# EAGLE board USBHostShield-Panel-v13 (EAGLE 7.4.0), part 1 of 3
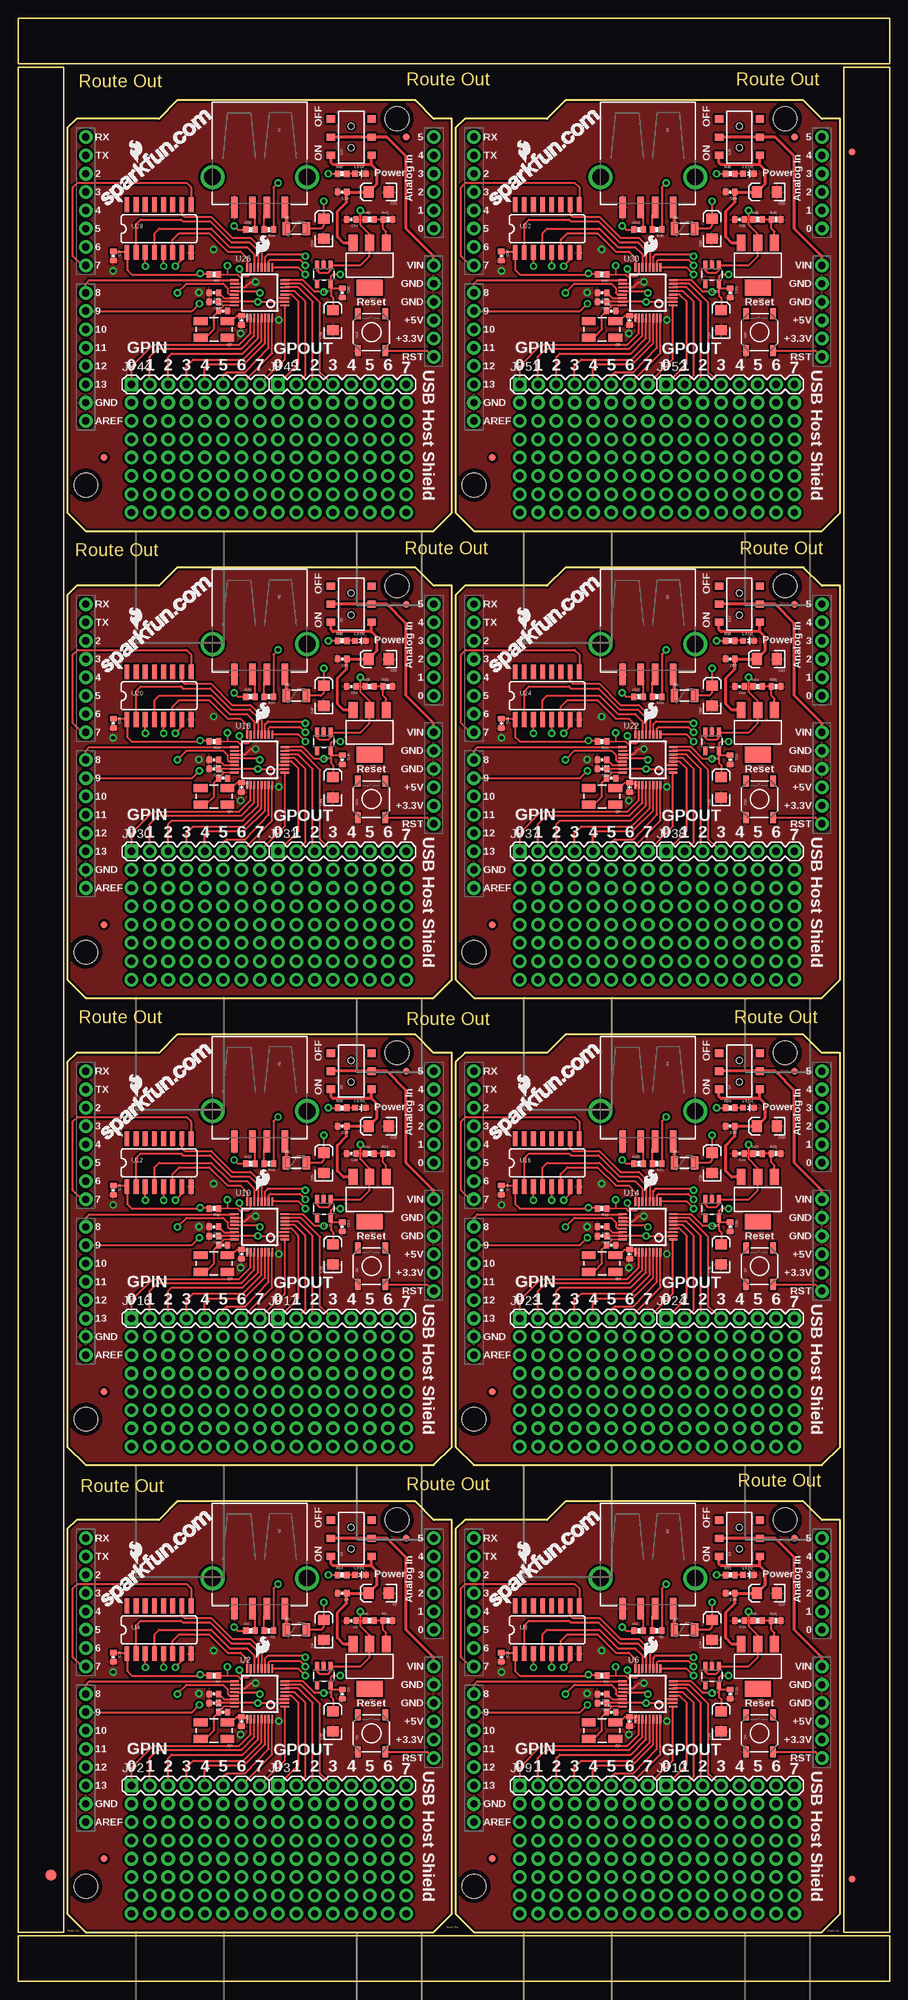
[diagram p0: board, top side]
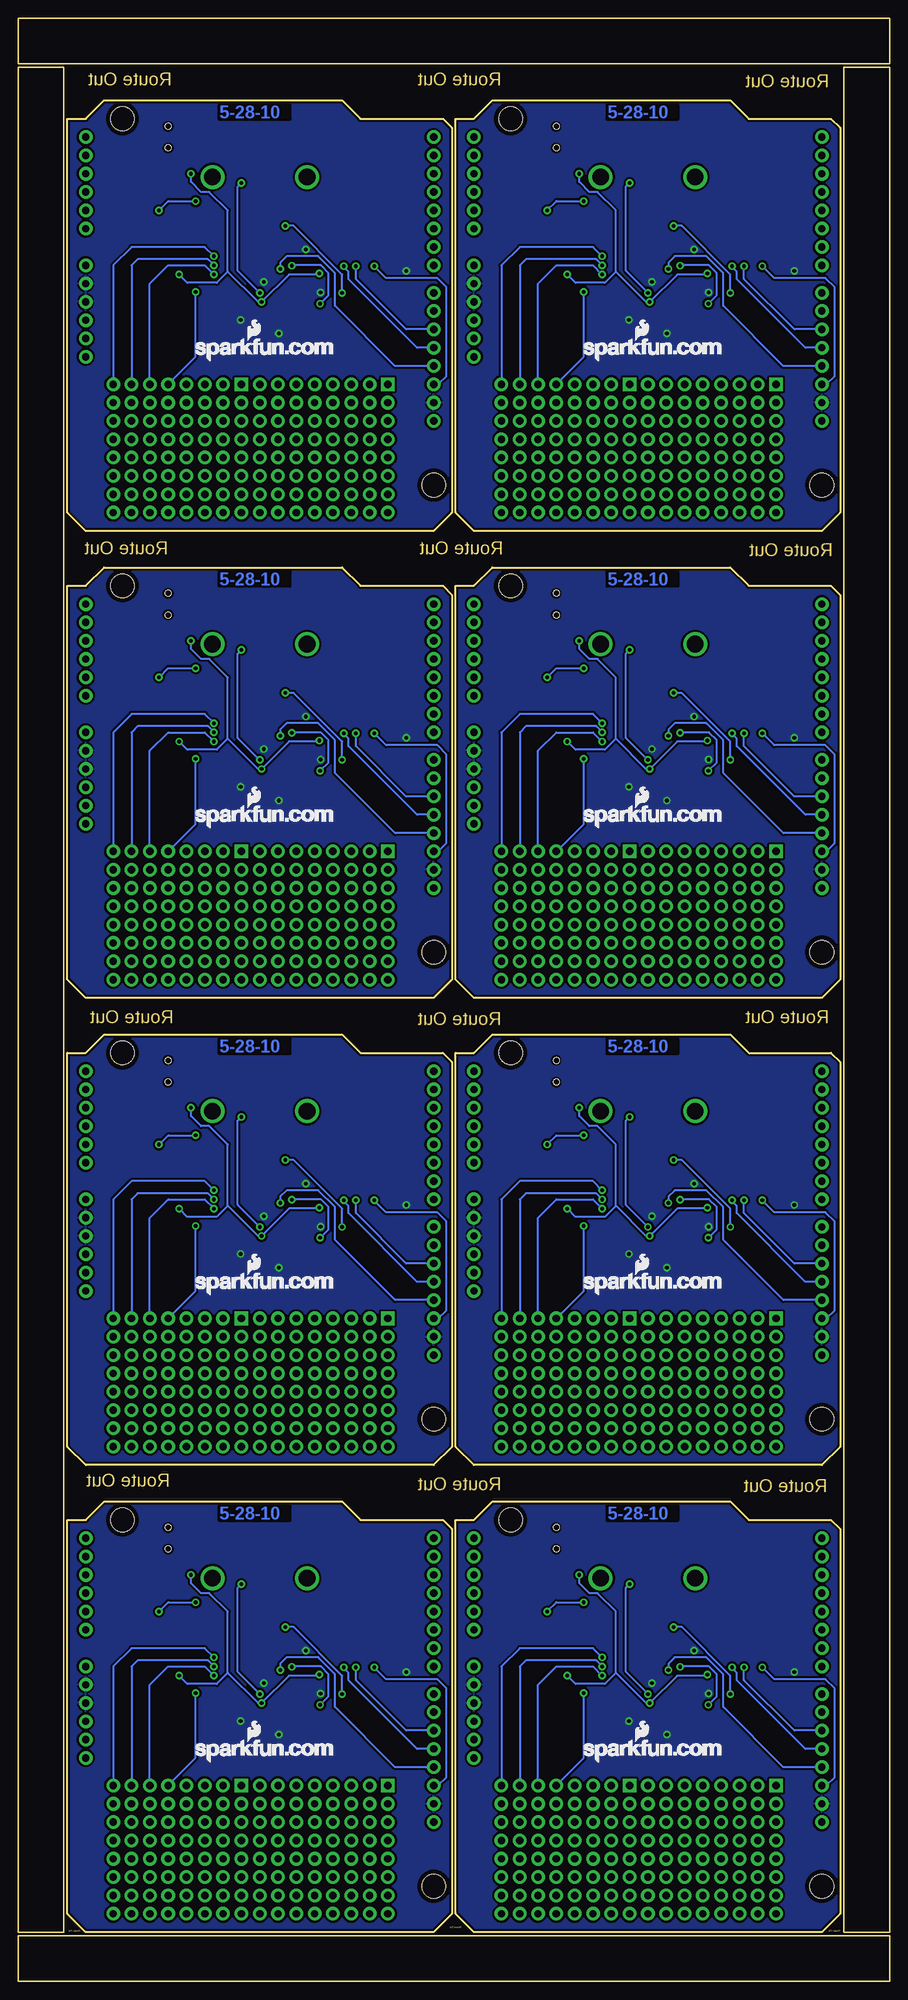
[diagram p1: board, bottom side, seen from below]

Size 120.9 x 272.29 mm. Coordinates in mm from the lower left corner, seen from the top.
Outline: 6.35,79.25 6.35,6.86 0,6.86 0,29.72
Outline: 0,27.18 0,265.43 6.35,265.43 6.35,76.71
Outline: 79.25,0 0,0 0,6.35 29.72,6.35
Outline: 27.18,6.35 120.9,6.35 120.9,0 76.71,0
Outline: 120.9,79.25 120.9,6.86 114.55,6.86 114.55,29.72
Outline: 114.55,27.18 114.55,265.43 120.9,265.43 120.9,76.71
Outline: 79.25,265.94 0,265.94 0,272.29 29.72,272.29
Outline: 27.18,272.29 120.9,272.29 120.9,265.94 76.71,265.94
Outline: 6.86,9.4 9.4,6.86 57.66,6.86 60.2,9.4 60.2,64.01 57.66,64.01 55.12,66.55 22.1,66.55 19.56,64.01 8.13,64.01 6.86,62.74 6.86,9.4
Outline: 60.71,9.4 63.25,6.86 111.51,6.86 114.05,9.4 114.05,64.01 111.51,64.01 108.97,66.55 75.95,66.55 73.41,64.01 61.98,64.01 60.71,62.74 60.71,9.4
Outline: 6.86,74.17 9.4,71.63 57.66,71.63 60.2,74.17 60.2,128.78 57.66,128.78 55.12,131.32 22.1,131.32 19.56,128.78 8.13,128.78 6.86,127.51 6.86,74.17
Outline: 60.71,74.17 63.25,71.63 111.51,71.63 114.05,74.17 114.05,128.78 111.51,128.78 108.97,131.32 75.95,131.32 73.41,128.78 61.98,128.78 60.71,127.51 60.71,74.17
Outline: 6.86,138.94 9.4,136.4 57.66,136.4 60.2,138.94 60.2,193.55 57.66,193.55 55.12,196.09 22.1,196.09 19.56,193.55 8.13,193.55 6.86,192.28 6.86,138.94
Outline: 60.71,138.94 63.25,136.4 111.51,136.4 114.05,138.94 114.05,193.55 111.51,193.55 108.97,196.09 75.95,196.09 73.41,193.55 61.98,193.55 60.71,192.28 60.71,138.94
Outline: 6.86,203.71 9.4,201.17 57.66,201.17 60.2,203.71 60.2,258.32 57.66,258.32 55.12,260.86 22.1,260.86 19.56,258.32 8.13,258.32 6.86,257.05 6.86,203.71
Outline: 60.71,203.71 63.25,201.17 111.51,201.17 114.05,203.71 114.05,258.32 111.51,258.32 108.97,260.86 75.95,260.86 73.41,258.32 61.98,258.32 60.71,257.05 60.71,203.71
Copper layers (1*16): Top 0.035mm / dielectric 1.5mm / Bottom 0.035mm
Design rules "SparkFun": minimum track width 8mil, minimum drill 20mil, track to track 8mil, track to pad 8mil, pad to pad 8mil, via to via 8mil, smd to smd 8mil, copper to edge 8mil, drill to drill 8mil, minimum pad ring 12mil, minimum via ring 10mil, stop-mask expansion 4mil, vias tented up to drill 20mil, thermal gap 10mil

## Footprints (pad centres in the part's own frame; a part is rotated, then mirrored left to right if it is on the bottom)
0402-CAP = smd 0.7 x 0.9: 1 -0.65,0; 2 0.65,0
EIA3216 = smd 1.4 x 1.6: A 1.4,0; C -1.4,0
FIDUCIAL-1.5X3 = smd 1.5 x 1.5: 1 0,0
FIDUCIAL-1X2 = smd 1 x 1: 1 0,0
PTC-1206 = smd 1 x 1.8: 1 -1.4,0; 2 1.4,0
SOT223 = smd 1.219 x 2.235: 1 -2.311,-3.099; 2 0,-3.099; 3 2.311,-3.099 | smd 3.6 x 2.2: 4 0,3.099
1X08 = drill 1.016 pad 1.88 square: 1 0,0 | drill 1.016 pad 1.88: 2 2.54,0; 3 5.08,0; 4 7.62,0; 5 10.16,0; 6 12.7,0; 7 15.24,0; 8 17.78,0
LED-0603 = smd 0.8 x 0.8: A 0,-0.75; C 0,0.75
CRYSTAL-SMD-5X3 = smd 1.9 x 1.1: 1 -1.85,-1.15; 2 1.85,-1.15; 3 1.85,1.15; 4 -1.85,1.15
0402-RES = smd 0.7 x 0.9: 1 -0.65,0; 2 0.65,0
AYZ0202 = smd 1 x 1.15: 1 -2.5,2.825; 2 0,2.825; 3 2.5,2.825; 4 -2.5,-2.825; 5 0,-2.825; 6 2.5,-2.825 | hole 0.85: 1.5,0; -1.5,0
TACTILE_SWITCH_SMD = smd 1.524 x 0.762: 1 -2.54,1.905; 2 2.54,1.905; 3 -2.54,-1.905; 4 2.54,-1.905
DUEMILANOVE_SHIELD = drill 1.016 pad 1.88: 3.3V 50.8,26.67; 5V 50.8,29.21; A0 50.8,41.91; A1 50.8,44.45; A2 50.8,46.99; A3 50.8,49.53; A4 50.8,52.07; A5 50.8,54.61; AREF 2.54,15.24; D2 2.54,49.53; D3 2.54,46.99; D4 2.54,44.45; D5 2.54,41.91; D6 2.54,39.37; D7 2.54,36.83; D8 2.54,33.02; D9 2.54,30.48; D10 2.54,27.94; D11 2.54,25.4; D12 2.54,22.86; D13 2.54,20.32; GND@0 50.8,31.75; GND@1 50.8,34.29; GND@2 2.54,17.78; RES 50.8,24.13; RX 2.54,54.61; TX 2.54,52.07; VIN 50.8,36.83 | hole 3.302: 45.72,57.15; 2.54,6.35
TQFP32-5MM = smd 1.143 x 0.254: 1 -3.5,1.75; 2 -3.5,1.25; 3 -3.5,0.75; 4 -3.5,0.25; 5 -3.5,-0.25; 6 -3.5,-0.75; 7 -3.5,-1.25; 8 -3.5,-1.75; 17 3.5,-1.75; 18 3.5,-1.25; 19 3.5,-0.75; 20 3.5,-0.25; 21 3.5,0.25; 22 3.5,0.75; 23 3.5,1.25; 24 3.5,1.75 | smd 0.254 x 1.143: 9 -1.75,-3.5; 10 -1.25,-3.5; 11 -0.75,-3.5; 12 -0.25,-3.5; 13 0.25,-3.5; 14 0.75,-3.5; 15 1.25,-3.5; 16 1.75,-3.5; 25 1.75,3.5; 26 1.25,3.5; 27 0.75,3.5; 28 0.25,3.5; 29 -0.25,3.5; 30 -0.75,3.5; 31 -1.25,3.5; 32 -1.75,3.5
SOT23-5 = smd 0.55 x 1.2: 1 -0.95,-1.3; 2 0,-1.3; 3 0.95,-1.3; 4 0.95,1.3; 5 -0.95,1.3
SO016 = smd 0.66 x 2.032: 1 -4.445,-3.315; 2 -3.175,-3.315; 3 -1.905,-3.315; 4 -0.635,-3.315; 5 0.635,-3.315; 6 1.905,-3.315; 7 3.175,-3.315; 8 4.445,-3.315; 9 4.445,3.315; 10 3.175,3.315; 11 1.905,3.315; 12 0.635,3.315; 13 -0.635,3.315; 14 -1.905,3.315; 15 -3.175,3.315; 16 -4.445,3.315
USB-A-S-SILK-FEMALE = smd 3 x 0.9: D+ 7.212,-1; D- 7.212,1; GND 7.212,-3.5; VBUS 7.212,3.5 | drill 2.311: P$5 3,-6.566; P$6 3,6.566

## Placement (x,y rotation side)
C1  0.1uF  [0402-CAP]  27.18,39.88 180 top
C2  0.1uF  [0402-CAP]  27.18,38.61 180 top
C3  0.1uF  [0402-CAP]  44.96,39.88 270 top
C4  10uF  [EIA3216]  42.42,48.77 90 top
C5  18pF  [0402-CAP]  30.99,36.07 270 top
C6  18pF  [0402-CAP]  28.45,37.34 0 top
C7  10uF  [EIA3216]  50.04,53.85 180 top
C8  0.1uF  [0402-CAP]  44.96,53.85 180 top
C9  0.1uF  [0402-CAP]  46.23,50.04 180 top
C10  10uF  [EIA3216]  43.69,36.07 90 top
C11  0.1uF  [0402-CAP]  13.21,44.96 270 top
C12  0.1uF  [0402-CAP]  81.03,38.61 180 top
C13  0.1uF  [0402-CAP]  98.81,39.88 270 top
C14  10uF  [EIA3216]  96.27,48.77 90 top
C15  18pF  [0402-CAP]  84.84,36.07 270 top
C16  18pF  [0402-CAP]  82.3,37.34 0 top
C17  10uF  [EIA3216]  103.89,53.85 180 top
C18  0.1uF  [0402-CAP]  98.81,53.85 180 top
C19  0.1uF  [0402-CAP]  100.08,50.04 180 top
C20  0.1uF  [0402-CAP]  81.03,39.88 180 top
C21  10uF  [EIA3216]  97.54,36.07 90 top
C22  0.1uF  [0402-CAP]  67.06,44.96 270 top
C23  0.1uF  [0402-CAP]  27.18,103.38 180 top
C24  0.1uF  [0402-CAP]  44.96,104.65 270 top
C25  10uF  [EIA3216]  42.42,113.54 90 top
C26  18pF  [0402-CAP]  30.99,100.84 270 top
C27  18pF  [0402-CAP]  28.45,102.11 0 top
C28  10uF  [EIA3216]  50.04,118.62 180 top
C29  0.1uF  [0402-CAP]  44.96,118.62 180 top
C30  0.1uF  [0402-CAP]  46.23,114.81 180 top
C31  0.1uF  [0402-CAP]  27.18,104.65 180 top
C32  10uF  [EIA3216]  43.69,100.84 90 top
C33  0.1uF  [0402-CAP]  13.21,109.73 270 top
C34  0.1uF  [0402-CAP]  81.03,103.38 180 top
C35  0.1uF  [0402-CAP]  98.81,104.65 270 top
C36  10uF  [EIA3216]  96.27,113.54 90 top
C37  18pF  [0402-CAP]  84.84,100.84 270 top
C38  18pF  [0402-CAP]  82.3,102.11 0 top
C39  10uF  [EIA3216]  103.89,118.62 180 top
C40  0.1uF  [0402-CAP]  98.81,118.62 180 top
C41  0.1uF  [0402-CAP]  100.08,114.81 180 top
C42  0.1uF  [0402-CAP]  81.03,104.65 180 top
C43  10uF  [EIA3216]  97.54,100.84 90 top
C44  0.1uF  [0402-CAP]  67.06,109.73 270 top
C45  0.1uF  [0402-CAP]  27.18,168.15 180 top
C46  0.1uF  [0402-CAP]  44.96,169.42 270 top
C47  10uF  [EIA3216]  42.42,178.31 90 top
C48  18pF  [0402-CAP]  30.99,165.61 270 top
C49  18pF  [0402-CAP]  28.45,166.88 0 top
C50  10uF  [EIA3216]  50.04,183.39 180 top
C51  0.1uF  [0402-CAP]  44.96,183.39 180 top
C52  0.1uF  [0402-CAP]  46.23,179.58 180 top
C53  0.1uF  [0402-CAP]  27.18,169.42 180 top
C54  10uF  [EIA3216]  43.69,165.61 90 top
C55  0.1uF  [0402-CAP]  13.21,174.5 270 top
C56  0.1uF  [0402-CAP]  81.03,168.15 180 top
C57  0.1uF  [0402-CAP]  98.81,169.42 270 top
C58  10uF  [EIA3216]  96.27,178.31 90 top
C59  18pF  [0402-CAP]  84.84,165.61 270 top
C60  18pF  [0402-CAP]  82.3,166.88 0 top
C61  10uF  [EIA3216]  103.89,183.39 180 top
C62  0.1uF  [0402-CAP]  98.81,183.39 180 top
C63  0.1uF  [0402-CAP]  100.08,179.58 180 top
C64  0.1uF  [0402-CAP]  81.03,169.42 180 top
C65  10uF  [EIA3216]  97.54,165.61 90 top
C66  0.1uF  [0402-CAP]  67.06,174.5 270 top
C67  0.1uF  [0402-CAP]  27.18,232.92 180 top
C68  0.1uF  [0402-CAP]  44.96,234.19 270 top
C69  10uF  [EIA3216]  42.42,243.08 90 top
C70  18pF  [0402-CAP]  30.99,230.38 270 top
C71  18pF  [0402-CAP]  28.45,231.65 0 top
C72  10uF  [EIA3216]  50.04,248.16 180 top
C73  0.1uF  [0402-CAP]  44.96,248.16 180 top
C74  0.1uF  [0402-CAP]  46.23,244.35 180 top
C75  0.1uF  [0402-CAP]  27.18,234.19 180 top
C76  10uF  [EIA3216]  43.69,230.38 90 top
C77  0.1uF  [0402-CAP]  13.21,239.27 270 top
C78  0.1uF  [0402-CAP]  81.03,232.92 180 top
C79  0.1uF  [0402-CAP]  98.81,234.19 270 top
C80  10uF  [EIA3216]  96.27,243.08 90 top
C81  18pF  [0402-CAP]  84.84,230.38 270 top
C82  18pF  [0402-CAP]  82.3,231.65 0 top
C83  10uF  [EIA3216]  103.89,248.16 180 top
C84  0.1uF  [0402-CAP]  98.81,248.16 180 top
C85  0.1uF  [0402-CAP]  100.08,244.35 180 top
C86  0.1uF  [0402-CAP]  81.03,234.19 180 top
C87  10uF  [EIA3216]  97.54,230.38 90 top
C88  0.1uF  [0402-CAP]  67.06,239.27 270 top
E$1  [FIDUCIAL-1.5X3]  4.57,14.73 0 top
E$2  [FIDUCIAL-1X2]  115.7,253.75 0 top
E$5  [FIDUCIAL-1X2]  115.7,14.22 0 top
F1  PTCSMD  [PTC-1206]  38.61,48.77 0 top
F2  PTCSMD  [PTC-1206]  92.46,48.77 0 top
F3  PTCSMD  [PTC-1206]  38.61,113.54 0 top
F4  PTCSMD  [PTC-1206]  92.46,113.54 0 top
F5  PTCSMD  [PTC-1206]  38.61,178.31 0 top
F6  PTCSMD  [PTC-1206]  92.46,178.31 0 top
F7  PTCSMD  [PTC-1206]  38.61,243.08 0 top
F8  PTCSMD  [PTC-1206]  92.46,243.08 0 top
IC1  lm1117  [SOT223]  48.77,43.69 180 top
IC2  lm1117  [SOT223]  102.62,43.69 180 top
IC3  lm1117  [SOT223]  48.77,108.46 180 top
IC4  lm1117  [SOT223]  102.62,108.46 180 top
IC5  lm1117  [SOT223]  48.77,173.23 180 top
IC6  lm1117  [SOT223]  102.62,173.23 180 top
IC7  lm1117  [SOT223]  48.77,238 180 top
IC8  lm1117  [SOT223]  102.62,238 180 top
JP1  LOGO-SFENEW  [SFE-NEW-WEBLOGO]  12.96,51.16 40 top
JP2  GPIN  [1X08]  15.75,27.18 0 top
JP3  GPOUT  [1X08]  36.07,27.18 0 top
JP4  LOGO-SFESK  [SFE-LOGO-FLAME]  33.02,44.96 0 top
JP5  LOGO-SFENEW  [SFE-NEW-WEBLOGO]  42.45,30.4 0 bottom
JP6  FIDUCIAL1X2  [FIDUCIAL-1X2]  11.94,17.02 0 top
JP7  FIDUCIAL1X2  [FIDUCIAL-1X2]  53.85,61.47 0 top
JP8  LOGO-SFENEW  [SFE-NEW-WEBLOGO]  66.81,51.16 40 top
JP9  GPIN  [1X08]  69.6,27.18 0 top
JP10  GPOUT  [1X08]  89.92,27.18 0 top
JP11  LOGO-SFENEW  [SFE-NEW-WEBLOGO]  96.3,30.4 0 bottom
JP12  LOGO-SFESK  [SFE-LOGO-FLAME]  86.87,44.96 0 top
JP13  FIDUCIAL1X2  [FIDUCIAL-1X2]  65.79,17.02 0 top
JP14  FIDUCIAL1X2  [FIDUCIAL-1X2]  107.7,61.47 0 top
JP15  LOGO-SFENEW  [SFE-NEW-WEBLOGO]  12.96,115.93 40 top
JP16  GPIN  [1X08]  15.75,91.95 0 top
JP17  GPOUT  [1X08]  36.07,91.95 0 top
JP18  LOGO-SFENEW  [SFE-NEW-WEBLOGO]  42.45,95.17 0 bottom
JP19  LOGO-SFESK  [SFE-LOGO-FLAME]  33.02,109.73 0 top
JP20  FIDUCIAL1X2  [FIDUCIAL-1X2]  11.94,81.79 0 top
JP21  FIDUCIAL1X2  [FIDUCIAL-1X2]  53.85,126.24 0 top
JP22  LOGO-SFENEW  [SFE-NEW-WEBLOGO]  66.81,115.93 40 top
JP23  GPIN  [1X08]  69.6,91.95 0 top
JP24  GPOUT  [1X08]  89.92,91.95 0 top
JP25  LOGO-SFENEW  [SFE-NEW-WEBLOGO]  96.3,95.17 0 bottom
JP26  LOGO-SFESK  [SFE-LOGO-FLAME]  86.87,109.73 0 top
JP27  FIDUCIAL1X2  [FIDUCIAL-1X2]  65.79,81.79 0 top
JP28  FIDUCIAL1X2  [FIDUCIAL-1X2]  107.7,126.24 0 top
JP29  LOGO-SFENEW  [SFE-NEW-WEBLOGO]  12.96,180.7 40 top
JP30  GPIN  [1X08]  15.75,156.72 0 top
JP31  GPOUT  [1X08]  36.07,156.72 0 top
JP32  LOGO-SFENEW  [SFE-NEW-WEBLOGO]  42.45,159.94 0 bottom
JP33  LOGO-SFESK  [SFE-LOGO-FLAME]  33.02,174.5 0 top
JP34  FIDUCIAL1X2  [FIDUCIAL-1X2]  11.94,146.56 0 top
JP35  FIDUCIAL1X2  [FIDUCIAL-1X2]  53.85,191.01 0 top
JP36  LOGO-SFENEW  [SFE-NEW-WEBLOGO]  66.81,180.7 40 top
JP37  GPIN  [1X08]  69.6,156.72 0 top
JP38  GPOUT  [1X08]  89.92,156.72 0 top
JP39  LOGO-SFENEW  [SFE-NEW-WEBLOGO]  96.3,159.94 0 bottom
JP40  LOGO-SFESK  [SFE-LOGO-FLAME]  86.87,174.5 0 top
JP41  FIDUCIAL1X2  [FIDUCIAL-1X2]  65.79,146.56 0 top
JP42  FIDUCIAL1X2  [FIDUCIAL-1X2]  107.7,191.01 0 top
JP43  LOGO-SFENEW  [SFE-NEW-WEBLOGO]  12.96,245.47 40 top
JP44  GPIN  [1X08]  15.75,221.49 0 top
JP45  GPOUT  [1X08]  36.07,221.49 0 top
JP46  LOGO-SFENEW  [SFE-NEW-WEBLOGO]  42.45,224.71 0 bottom
JP47  LOGO-SFESK  [SFE-LOGO-FLAME]  33.02,239.27 0 top
JP48  FIDUCIAL1X2  [FIDUCIAL-1X2]  11.94,211.33 0 top
JP49  FIDUCIAL1X2  [FIDUCIAL-1X2]  53.85,255.78 0 top
JP50  LOGO-SFENEW  [SFE-NEW-WEBLOGO]  66.81,245.47 40 top
JP51  GPIN  [1X08]  69.6,221.49 0 top
JP52  GPOUT  [1X08]  89.92,221.49 0 top
JP53  LOGO-SFENEW  [SFE-NEW-WEBLOGO]  96.3,224.71 0 bottom
JP54  LOGO-SFESK  [SFE-LOGO-FLAME]  86.87,239.27 0 top
JP55  FIDUCIAL1X2  [FIDUCIAL-1X2]  65.79,211.33 0 top
JP56  FIDUCIAL1X2  [FIDUCIAL-1X2]  107.7,255.78 0 top
LED1  red  [LED-0603]  47.5,56.39 270 top
LED2  red  [LED-0603]  101.35,56.39 270 top
LED3  red  [LED-0603]  47.5,121.16 270 top
LED4  red  [LED-0603]  101.35,121.16 270 top
LED5  red  [LED-0603]  47.5,185.93 270 top
LED6  red  [LED-0603]  101.35,185.93 270 top
LED7  red  [LED-0603]  47.5,250.7 270 top
LED8  red  [LED-0603]  101.35,250.7 270 top
Q1  12MHz  [CRYSTAL-SMD-5X3]  81.03,34.8 180 top
Q2  12MHz  [CRYSTAL-SMD-5X3]  27.18,34.8 180 top
Q3  12MHz  [CRYSTAL-SMD-5X3]  27.18,99.57 180 top
Q4  12MHz  [CRYSTAL-SMD-5X3]  81.03,99.57 180 top
Q5  12MHz  [CRYSTAL-SMD-5X3]  27.18,164.34 180 top
Q6  12MHz  [CRYSTAL-SMD-5X3]  81.03,164.34 180 top
Q7  12MHz  [CRYSTAL-SMD-5X3]  27.18,229.11 180 top
Q8  12MHz  [CRYSTAL-SMD-5X3]  81.03,229.11 180 top
R1  33  [0402-RES]  32.26,48.64 0 top
R2  33  [0402-RES]  34.8,48.64 180 top
R3  2.2K  [0402-RES]  81.03,42.42 180 top
R4  33  [0402-RES]  86.11,48.64 0 top
R5  33  [0402-RES]  88.65,48.64 180 top
R6  240  [0402-RES]  102.62,50.04 0 top
R7  2.2K  [0402-RES]  27.18,42.42 180 top
R8  240  [0402-RES]  48.77,50.04 0 top
R9  715  [0402-RES]  51.31,50.04 0 top
R10  715  [0402-RES]  105.16,50.04 0 top
R11  330  [0402-RES]  98.81,56.39 0 top
R12  2.2K  [0402-RES]  27.18,107.19 180 top
R13  33  [0402-RES]  32.26,113.41 0 top
R14  330  [0402-RES]  44.96,56.39 0 top
R15  33  [0402-RES]  34.8,113.41 180 top
R16  240  [0402-RES]  48.77,114.81 0 top
R17  715  [0402-RES]  51.31,114.81 0 top
R18  330  [0402-RES]  44.96,121.16 0 top
R19  2.2K  [0402-RES]  81.03,107.19 180 top
R20  33  [0402-RES]  86.11,113.41 0 top
R21  33  [0402-RES]  88.65,113.41 180 top
R22  240  [0402-RES]  102.62,114.81 0 top
R23  715  [0402-RES]  105.16,114.81 0 top
R24  330  [0402-RES]  98.81,121.16 0 top
R25  2.2K  [0402-RES]  27.18,171.96 180 top
R26  33  [0402-RES]  32.26,178.18 0 top
R27  33  [0402-RES]  34.8,178.18 180 top
R28  240  [0402-RES]  48.77,179.58 0 top
R29  715  [0402-RES]  51.31,179.58 0 top
R30  330  [0402-RES]  44.96,185.93 0 top
R31  2.2K  [0402-RES]  81.03,171.96 180 top
R32  33  [0402-RES]  86.11,178.18 0 top
R33  33  [0402-RES]  88.65,178.18 180 top
R34  240  [0402-RES]  102.62,179.58 0 top
R35  715  [0402-RES]  105.16,179.58 0 top
R36  330  [0402-RES]  98.81,185.93 0 top
R37  2.2K  [0402-RES]  27.18,236.73 180 top
R38  33  [0402-RES]  32.26,242.95 0 top
R39  33  [0402-RES]  34.8,242.95 180 top
R40  240  [0402-RES]  48.77,244.35 0 top
R41  715  [0402-RES]  51.31,244.35 0 top
R42  330  [0402-RES]  44.96,250.7 0 top
R43  2.2K  [0402-RES]  81.03,236.73 180 top
R44  33  [0402-RES]  86.11,242.95 0 top
R45  33  [0402-RES]  88.65,242.95 180 top
R46  240  [0402-RES]  102.62,244.35 0 top
R47  715  [0402-RES]  105.16,244.35 0 top
R48  330  [0402-RES]  98.81,250.7 0 top
S1  SWITCH-DPDTSMD  [AYZ0202]  46.23,61.47 90 top
S2  SWITCH-SMD  [TACTILE_SWITCH_SMD]  49.02,34.42 90 top
S3  SWITCH-DPDTSMD  [AYZ0202]  100.08,61.47 90 top
S4  SWITCH-SMD  [TACTILE_SWITCH_SMD]  102.87,34.42 90 top
S5  SWITCH-DPDTSMD  [AYZ0202]  46.23,126.24 90 top
S6  SWITCH-SMD  [TACTILE_SWITCH_SMD]  49.02,99.19 90 top
S7  SWITCH-DPDTSMD  [AYZ0202]  100.08,126.24 90 top
S8  SWITCH-SMD  [TACTILE_SWITCH_SMD]  102.87,99.19 90 top
S9  SWITCH-DPDTSMD  [AYZ0202]  46.23,191.01 90 top
S10  SWITCH-SMD  [TACTILE_SWITCH_SMD]  49.02,163.96 90 top
S11  SWITCH-DPDTSMD  [AYZ0202]  100.08,191.01 90 top
S12  SWITCH-SMD  [TACTILE_SWITCH_SMD]  102.87,163.96 90 top
S13  SWITCH-DPDTSMD  [AYZ0202]  46.23,255.78 90 top
S14  SWITCH-SMD  [TACTILE_SWITCH_SMD]  49.02,228.73 90 top
S15  SWITCH-DPDTSMD  [AYZ0202]  100.08,255.78 90 top
S16  SWITCH-SMD  [TACTILE_SWITCH_SMD]  102.87,228.73 90 top
U1  ARDUINO_SHIELD  [DUEMILANOVE_SHIELD]  6.86,6.86 0 top
U2  MAX3421E  [TQFP32-5MM]  33.53,39.88 180 top
U3  3.3V_REG  [SOT23-5]  42.42,42.42 180 top
U4  HEX_CONVERTER  [SO016]  19.56,48.77 0 top
U5  ARDUINO_SHIELD  [DUEMILANOVE_SHIELD]  60.71,6.86 0 top
U6  MAX3421E  [TQFP32-5MM]  87.38,39.88 180 top
U7  3.3V_REG  [SOT23-5]  96.27,42.42 180 top
U8  HEX_CONVERTER  [SO016]  73.41,48.77 0 top
U9  ARDUINO_SHIELD  [DUEMILANOVE_SHIELD]  6.86,71.63 0 top
U10  MAX3421E  [TQFP32-5MM]  33.53,104.65 180 top
U11  3.3V_REG  [SOT23-5]  42.42,107.19 180 top
U12  HEX_CONVERTER  [SO016]  19.56,113.54 0 top
U13  ARDUINO_SHIELD  [DUEMILANOVE_SHIELD]  60.71,71.63 0 top
U14  MAX3421E  [TQFP32-5MM]  87.38,104.65 180 top
U15  3.3V_REG  [SOT23-5]  96.27,107.19 180 top
U16  HEX_CONVERTER  [SO016]  73.41,113.54 0 top
U17  ARDUINO_SHIELD  [DUEMILANOVE_SHIELD]  6.86,136.4 0 top
U18  MAX3421E  [TQFP32-5MM]  33.53,169.42 180 top
U19  3.3V_REG  [SOT23-5]  42.42,171.96 180 top
U20  HEX_CONVERTER  [SO016]  19.56,178.31 0 top
U21  ARDUINO_SHIELD  [DUEMILANOVE_SHIELD]  60.71,136.4 0 top
U22  MAX3421E  [TQFP32-5MM]  87.38,169.42 180 top
U23  3.3V_REG  [SOT23-5]  96.27,171.96 180 top
U24  HEX_CONVERTER  [SO016]  73.41,178.31 0 top
U25  ARDUINO_SHIELD  [DUEMILANOVE_SHIELD]  6.86,201.17 0 top
U26  MAX3421E  [TQFP32-5MM]  33.53,234.19 180 top
U27  3.3V_REG  [SOT23-5]  42.42,236.73 180 top
U28  HEX_CONVERTER  [SO016]  19.56,243.08 0 top
U29  ARDUINO_SHIELD  [DUEMILANOVE_SHIELD]  60.71,201.17 0 top
U30  MAX3421E  [TQFP32-5MM]  87.38,234.19 180 top
U31  3.3V_REG  [SOT23-5]  96.27,236.73 180 top
U32  HEX_CONVERTER  [SO016]  73.41,243.08 0 top
X1  USB_  [USB-A-S-SILK-FEMALE]  87.38,58.93 270 top
X2  USB_  [USB-A-S-SILK-FEMALE]  33.53,58.93 270 top
X3  USB_  [USB-A-S-SILK-FEMALE]  33.53,123.7 270 top
X4  USB_  [USB-A-S-SILK-FEMALE]  87.38,123.7 270 top
X5  USB_  [USB-A-S-SILK-FEMALE]  33.53,188.47 270 top
X6  USB_  [USB-A-S-SILK-FEMALE]  87.38,188.47 270 top
X7  USB_  [USB-A-S-SILK-FEMALE]  33.53,253.24 270 top
X8  USB_  [USB-A-S-SILK-FEMALE]  87.38,253.24 270 top

## Library data of the parts
C1-C88 F1-F8 IC1-IC8 JP1-JP56 LED1-LED8 Q1-Q8 R1-R48 S1-S16 U1-U32 X1-X8 = SparkFun
E$1 = SparkFun-Retired
E$2 E$5 = SparkFun-Aesthetics

## Nets
3.3V: C2.1 C3.1 C10.A C11.1 R7.2 R14.1 U2.2 U2.23 U3.5 U4.1
3.3V1: C12.1 C13.1 C21.A C22.1 R3.2 R11.1 U6.2 U6.23 U7.5 U8.1
3.3V2: C23.1 C24.1 C32.A C33.1 R12.2 R18.1 U10.2 U10.23 U11.5 U12.1
3.3V3: C34.1 C35.1 C43.A C44.1 R19.2 R24.1 U14.2 U14.23 U15.5 U16.1
3.3V4: C45.1 C46.1 C54.A C55.1 R25.2 R30.1 U18.2 U18.23 U19.5 U20.1
3.3V5: C56.1 C57.1 C65.A C66.1 R31.2 R36.1 U22.2 U22.23 U23.5 U24.1
3.3V6: C67.1 C68.1 C76.A C77.1 R37.2 R42.1 U26.2 U26.23 U27.5 U28.1
3.3V7: C78.1 C79.1 C87.A C88.1 R43.2 R48.1 U30.2 U30.23 U31.5 U32.1
5V: C4.A C9.1 F1.2 IC1.2 R8.1 U3.1 U3.3
5V1: C14.A C19.1 F2.2 IC2.2 R6.1 U7.1 U7.3
5V2: C25.A C30.1 F3.2 IC3.2 R16.1 U11.1 U11.3
5V3: C36.A C41.1 F4.2 IC4.2 R22.1 U15.1 U15.3
5V4: C47.A C52.1 F5.2 IC5.2 R28.1 U19.1 U19.3
5V5: C58.A C63.1 F6.2 IC6.2 R34.1 U23.1 U23.3
5V6: C69.A C74.1 F7.2 IC7.2 R40.1 U27.1 U27.3
5V7: C80.A C85.1 F8.2 IC8.2 R46.1 U31.1 U31.3
GND: C1.2 C2.2 C3.2 C4.C C5.2 C6.2 C7.C C8.2 C9.2 C10.C C11.2 LED1.C R9.2 S2.1 U1.GND@0 U1.GND@1 U1.GND@2 U2.3 U2.19 U3.2 U4.8 X2.GND
GND1: C12.2 C13.2 C14.C C15.2 C16.2 C17.C C18.2 C19.2 C20.2 C21.C C22.2 LED2.C R10.2 S4.1 U5.GND@0 U5.GND@1 U5.GND@2 U6.3 U6.19 U7.2 U8.8 X1.GND
GND2: C23.2 C24.2 C25.C C26.2 C27.2 C28.C C29.2 C30.2 C31.2 C32.C C33.2 LED3.C R17.2 S6.1 U9.GND@0 U9.GND@1 U9.GND@2 U10.3 U10.19 U11.2 U12.8 X3.GND
GND3: C34.2 C35.2 C36.C C37.2 C38.2 C39.C C40.2 C41.2 C42.2 C43.C C44.2 LED4.C R23.2 S8.1 U13.GND@0 U13.GND@1 U13.GND@2 U14.3 U14.19 U15.2 U16.8 X4.GND
GND4: C45.2 C46.2 C47.C C48.2 C49.2 C50.C C51.2 C52.2 C53.2 C54.C C55.2 LED5.C R29.2 S10.1 U17.GND@0 U17.GND@1 U17.GND@2 U18.3 U18.19 U19.2 U20.8 X5.GND
GND5: C56.2 C57.2 C58.C C59.2 C60.2 C61.C C62.2 C63.2 C64.2 C65.C C66.2 LED6.C R35.2 S12.1 U21.GND@0 U21.GND@1 U21.GND@2 U22.3 U22.19 U23.2 U24.8 X6.GND
GND6: C67.2 C68.2 C69.C C70.2 C71.2 C72.C C73.2 C74.2 C75.2 C76.C C77.2 LED7.C R41.2 S14.1 U25.GND@0 U25.GND@1 U25.GND@2 U26.3 U26.19 U27.2 U28.8 X7.GND
GND7: C78.2 C79.2 C80.C C81.2 C82.2 C83.C C84.2 C85.2 C86.2 C87.C C88.2 LED8.C R47.2 S16.1 U29.GND@0 U29.GND@1 U29.GND@2 U30.3 U30.19 U31.2 U32.8 X8.GND
GPX: U1.D8 U2.17
GPX1: U5.D8 U6.17
GPX2: U9.D8 U10.17
GPX3: U13.D8 U14.17
GPX4: U17.D8 U18.17
GPX5: U21.D8 U22.17
GPX6: U25.D8 U26.17
GPX7: U29.D8 U30.17
INT: R7.1 U1.D9 U2.18
INT1: R3.1 U5.D9 U6.18
INT2: R12.1 U9.D9 U10.18
INT3: R19.1 U13.D9 U14.18
INT4: R25.1 U17.D9 U18.18
INT5: R31.1 U21.D9 U22.18
INT6: R37.1 U25.D9 U26.18
INT7: R43.1 U29.D9 U30.18
MISO: U1.D12 U2.15
MISO1: U5.D12 U6.15
MISO2: U9.D12 U10.15
MISO3: U13.D12 U14.15
MISO4: U17.D12 U18.15
MISO5: U21.D12 U22.15
MISO6: U25.D12 U26.15
MISO7: U29.D12 U30.15
MOSI: U1.D11 U4.7
MOSI1: U5.D11 U8.7
MOSI2: U9.D11 U12.7
MOSI3: U13.D11 U16.7
MOSI4: U17.D11 U20.7
MOSI5: U21.D11 U24.7
MOSI6: U25.D11 U28.7
MOSI7: U29.D11 U32.7
MOSI-IN: U2.16 U4.6
MOSI-IN1: U6.16 U8.6
MOSI-IN2: U10.16 U12.6
MOSI-IN3: U14.16 U16.6
MOSI-IN4: U18.16 U20.6
MOSI-IN5: U22.16 U24.6
MOSI-IN6: U26.16 U28.6
MOSI-IN7: U30.16 U32.6
N$1: JP2.8 U2.1
N$2: R2.1 U2.20
N$3: R1.1 U2.21
N$4: JP3.1 U2.4
N$5: R1.2 X2.D+
N$6: JP3.2 U2.5
N$7: JP3.3 U2.6
N$8: R2.2 X2.D-
N$9: C5.1 Q2.1 U2.25
N$10: C6.1 Q2.3 U2.24
N$11: IC1.1 R8.2 R9.1
N$12: S2.3 U1.RES
N$13: JP3.4 U2.7
N$14: JP3.5 U2.8
N$15: JP3.6 U2.9
N$16: JP3.7 U2.10
N$17: JP3.8 U2.11
N$18: JP2.7 U2.32
N$19: JP2.6 U2.31
N$20: JP2.5 U2.30
N$21: JP2.4 U2.29
N$22: JP2.3 U2.28
N$23: JP2.2 U2.27
N$24: JP2.1 U2.26
N$25: LED1.A R14.2
N$138: F1.1 X2.VBUS
N$139: R4.2 X1.D+
N$140: R5.2 X1.D-
N$141: R5.1 U6.20
N$142: R4.1 U6.21
N$143: C15.1 Q1.1 U6.25
N$144: C16.1 Q1.3 U6.24
N$145: IC2.1 R6.2 R10.1
N$146: JP9.8 U6.1
N$147: JP10.1 U6.4
N$148: JP10.2 U6.5
N$149: JP10.3 U6.6
N$150: JP10.4 U6.7
N$151: JP10.5 U6.8
N$152: JP10.6 U6.9
N$153: JP10.7 U6.10
N$154: JP10.8 U6.11
N$155: JP9.7 U6.32
N$156: JP9.6 U6.31
N$157: JP9.5 U6.30
N$158: JP9.4 U6.29
N$159: JP9.3 U6.28
N$160: JP9.2 U6.27
N$161: JP9.1 U6.26
N$162: S4.3 U5.RES
N$163: LED2.A R11.2
N$276: F2.1 X1.VBUS
N$277: R13.2 X3.D+
N$278: R15.2 X3.D-
N$279: R15.1 U10.20
N$280: R13.1 U10.21
N$281: C26.1 Q3.1 U10.25
N$282: C27.1 Q3.3 U10.24
N$283: IC3.1 R16.2 R17.1
N$284: JP16.8 U10.1
N$285: JP17.1 U10.4
N$286: JP17.2 U10.5
N$287: JP17.3 U10.6
N$288: JP17.4 U10.7
N$289: JP17.5 U10.8
N$290: JP17.6 U10.9
N$291: JP17.7 U10.10
N$292: JP17.8 U10.11
N$293: JP16.7 U10.32
N$294: JP16.6 U10.31
N$295: JP16.5 U10.30
N$296: JP16.4 U10.29
N$297: JP16.3 U10.28
N$298: JP16.2 U10.27
N$299: JP16.1 U10.26
N$300: S6.3 U9.RES
N$301: LED3.A R18.2
N$414: F3.1 X3.VBUS
N$415: R20.2 X4.D+
N$416: R21.2 X4.D-
N$417: R21.1 U14.20
N$418: R20.1 U14.21
N$419: C37.1 Q4.1 U14.25
N$420: C38.1 Q4.3 U14.24
N$421: IC4.1 R22.2 R23.1
N$422: JP23.8 U14.1
N$423: JP24.1 U14.4
N$424: JP24.2 U14.5
N$425: JP24.3 U14.6
N$426: JP24.4 U14.7
N$427: JP24.5 U14.8
N$428: JP24.6 U14.9
N$429: JP24.7 U14.10
N$430: JP24.8 U14.11
N$431: JP23.7 U14.32
N$432: JP23.6 U14.31
N$433: JP23.5 U14.30
N$434: JP23.4 U14.29
N$435: JP23.3 U14.28
N$436: JP23.2 U14.27
N$437: JP23.1 U14.26
N$438: S8.3 U13.RES
N$439: LED4.A R24.2
N$552: F4.1 X4.VBUS
N$553: R26.2 X5.D+
N$554: R27.2 X5.D-
N$555: R27.1 U18.20
N$556: R26.1 U18.21
N$557: C48.1 Q5.1 U18.25
N$558: C49.1 Q5.3 U18.24
N$559: IC5.1 R28.2 R29.1
N$560: JP30.8 U18.1
N$561: JP31.1 U18.4
N$562: JP31.2 U18.5
N$563: JP31.3 U18.6
N$564: JP31.4 U18.7
N$565: JP31.5 U18.8
N$566: JP31.6 U18.9
N$567: JP31.7 U18.10
N$568: JP31.8 U18.11
N$569: JP30.7 U18.32
N$570: JP30.6 U18.31
N$571: JP30.5 U18.30
N$572: JP30.4 U18.29
N$573: JP30.3 U18.28
N$574: JP30.2 U18.27
N$575: JP30.1 U18.26
N$576: S10.3 U17.RES
N$577: LED5.A R30.2
N$690: F5.1 X5.VBUS
N$691: R32.2 X6.D+
N$692: R33.2 X6.D-
N$693: R33.1 U22.20
N$694: R32.1 U22.21
N$695: C59.1 Q6.1 U22.25
N$696: C60.1 Q6.3 U22.24
N$697: IC6.1 R34.2 R35.1
N$698: JP37.8 U22.1
N$699: JP38.1 U22.4
N$700: JP38.2 U22.5
N$701: JP38.3 U22.6
N$702: JP38.4 U22.7
N$703: JP38.5 U22.8
N$704: JP38.6 U22.9
N$705: JP38.7 U22.10
N$706: JP38.8 U22.11
N$707: JP37.7 U22.32
N$708: JP37.6 U22.31
N$709: JP37.5 U22.30
N$710: JP37.4 U22.29
N$711: JP37.3 U22.28
N$712: JP37.2 U22.27
N$713: JP37.1 U22.26
N$714: S12.3 U21.RES
N$715: LED6.A R36.2
N$828: F6.1 X6.VBUS
N$829: R38.2 X7.D+
N$830: R39.2 X7.D-
N$831: R39.1 U26.20
N$832: R38.1 U26.21
N$833: C70.1 Q7.1 U26.25
N$834: C71.1 Q7.3 U26.24
N$835: IC7.1 R40.2 R41.1
N$836: JP44.8 U26.1
N$837: JP45.1 U26.4
N$838: JP45.2 U26.5
N$839: JP45.3 U26.6
N$840: JP45.4 U26.7
N$841: JP45.5 U26.8
N$842: JP45.6 U26.9
N$843: JP45.7 U26.10
N$844: JP45.8 U26.11
N$845: JP44.7 U26.32
N$846: JP44.6 U26.31
N$847: JP44.5 U26.30
N$848: JP44.4 U26.29
N$849: JP44.3 U26.28
N$850: JP44.2 U26.27
N$851: JP44.1 U26.26
N$852: S14.3 U25.RES
N$853: LED7.A R42.2
N$966: F7.1 X7.VBUS
N$967: R44.2 X8.D+
N$968: R45.2 X8.D-
N$969: R45.1 U30.20
N$970: R44.1 U30.21
N$971: C81.1 Q8.1 U30.25
N$972: C82.1 Q8.3 U30.24
N$973: IC8.1 R46.2 R47.1
N$974: JP51.8 U30.1
N$975: JP52.1 U30.4
N$976: JP52.2 U30.5
N$977: JP52.3 U30.6
N$978: JP52.4 U30.7
N$979: JP52.5 U30.8
N$980: JP52.6 U30.9
N$981: JP52.7 U30.10
N$982: JP52.8 U30.11
N$983: JP51.7 U30.32
N$984: JP51.6 U30.31
N$985: JP51.5 U30.30
N$986: JP51.4 U30.29
N$987: JP51.3 U30.28
N$988: JP51.2 U30.27
N$989: JP51.1 U30.26
N$990: S16.3 U29.RES
N$991: LED8.A R48.2
N$1104: F8.1 X8.VBUS
RESET: U1.D7 U4.9
RESET1: U5.D7 U8.9
RESET2: U9.D7 U12.9
RESET3: U13.D7 U16.9
RESET4: U17.D7 U20.9
RESET5: U21.D7 U24.9
RESET6: U25.D7 U28.9
RESET7: U29.D7 U32.9
RESET-IN: U2.12 U4.10
RESET-IN1: U6.12 U8.10
RESET-IN2: U10.12 U12.10
RESET-IN3: U14.12 U16.10
RESET-IN4: U18.12 U20.10
RESET-IN5: U22.12 U24.10
RESET-IN6: U26.12 U28.10
RESET-IN7: U30.12 U32.10
SCK: U1.D13 U4.3
SCK1: U5.D13 U8.3
SCK2: U9.D13 U12.3
SCK3: U13.D13 U16.3
SCK4: U17.D13 U20.3
SCK5: U21.D13 U24.3
SCK6: U25.D13 U28.3
SCK7: U29.D13 U32.3
SCK-IN: U2.13 U4.2
SCK-IN1: U6.13 U8.2
SCK-IN2: U10.13 U12.2
SCK-IN3: U14.13 U16.2
SCK-IN4: U18.13 U20.2
SCK-IN5: U22.13 U24.2
SCK-IN6: U26.13 U28.2
SCK-IN7: U30.13 U32.2
SS: U1.D10 U4.5
SS1: U5.D10 U8.5
SS2: U9.D10 U12.5
SS3: U13.D10 U16.5
SS4: U17.D10 U20.5
SS5: U21.D10 U24.5
SS6: U25.D10 U28.5
SS7: U29.D10 U32.5
SS-IN: U2.14 U4.4
SS-IN1: U6.14 U8.4
SS-IN2: U10.14 U12.4
SS-IN3: U14.14 U16.4
SS-IN4: U18.14 U20.4
SS-IN5: U22.14 U24.4
SS-IN6: U26.14 U28.4
SS-IN7: U30.14 U32.4
VBCOMP: C1.1 U2.22
VBCOMP1: C20.1 U6.22
VBCOMP2: C31.1 U10.22
VBCOMP3: C42.1 U14.22
VBCOMP4: C53.1 U18.22
VBCOMP5: C64.1 U22.22
VBCOMP6: C75.1 U26.22
VBCOMP7: C86.1 U30.22
VBUS: C7.A C8.1 IC1.3 S1.1 S1.4
VBUS1: C17.A C18.1 IC2.3 S3.1 S3.4
VBUS2: C28.A C29.1 IC3.3 S5.1 S5.4
VBUS3: C39.A C40.1 IC4.3 S7.1 S7.4
VBUS4: C50.A C51.1 IC5.3 S9.1 S9.4
VBUS5: C61.A C62.1 IC6.3 S11.1 S11.4
VBUS6: C72.A C73.1 IC7.3 S13.1 S13.4
VBUS7: C83.A C84.1 IC8.3 S15.1 S15.4
VIN: S1.2 S1.5 U1.VIN
VIN1: S3.2 S3.5 U5.VIN
VIN2: S5.2 S5.5 U9.VIN
VIN3: S7.2 S7.5 U13.VIN
VIN4: S9.2 S9.5 U17.VIN
VIN5: S11.2 S11.5 U21.VIN
VIN6: S13.2 S13.5 U25.VIN
VIN7: S15.2 S15.5 U29.VIN

## Tracks (layer width: path | path; a pad name or v marks a point on that pad's centre or on a via)
3.3V  (via drill 0.51)
  Top 0.254: v43.05,56.39 R14.1 | v44.7,42.42 43.69,42.42 43.37,42.1 U3.5 43.4,41.15 43.4,40.51 | U2.2 33.29,38.63 v33.27,38.61 33.25,38.63 U2.23 27.85,38.63 C2.1 | R7.2 26.4,42.55 v25.27,42.55 25.15,42.42 15.75,42.42 15.11,43.05 U4.1 14.96,45.61 C11.1 | 43.4,40.51 43.4,39.46 43.69,39.17 C10.A | C3.1 43.41,40.53 43.4,40.51
  Bottom 0.254: v25.27,42.55 25.4,42.42 29.46,42.42 v33.27,38.61 33.29,38.63 33.78,38.63 37.97,42.82 | v43.05,56.39 43.05,55.24 41.66,53.85 40.51,53.85 37.97,51.31 37.97,42.82 | 37.97,42.82 37.97,42.8 39.5,41.27 43.56,41.27 v44.7,42.42
3.3V1  (via drill 0.51)
  Top 0.254: v96.9,56.39 R11.1 | v98.55,42.42 97.54,42.42 97.22,42.1 U7.5 97.25,41.15 97.25,40.51 | U6.2 87.14,38.63 v87.12,38.61 87.1,38.63 U6.23 81.7,38.63 C12.1 | R3.2 80.25,42.55 v79.12,42.55 78.99,42.42 69.6,42.42 68.96,43.05 U8.1 68.81,45.61 C22.1 | 97.25,40.51 97.25,39.46 97.54,39.17 C21.A | C13.1 97.26,40.53 97.25,40.51
  Bottom 0.254: v79.12,42.55 79.25,42.42 83.31,42.42 v87.12,38.61 87.14,38.63 87.63,38.63 91.82,42.82 | v96.9,56.39 96.9,55.24 95.5,53.85 94.36,53.85 91.82,51.31 91.82,42.82 | 91.82,42.82 91.82,42.8 93.34,41.27 97.41,41.27 v98.55,42.42
3.3V2  (via drill 0.51)
  Top 0.254: v43.05,121.16 R18.1 | v44.7,107.19 43.69,107.19 43.37,106.87 U11.5 43.4,105.92 43.4,105.28 | U10.2 33.29,103.4 v33.27,103.38 33.25,103.4 U10.23 27.85,103.4 C23.1 | R12.2 26.4,107.31 v25.27,107.31 25.15,107.19 15.75,107.19 15.11,107.82 U12.1 14.96,110.38 C33.1 | 43.4,105.28 43.4,104.23 43.69,103.94 C32.A | C24.1 43.41,105.3 43.4,105.28
  Bottom 0.254: v25.27,107.31 25.4,107.19 29.46,107.19 v33.27,103.38 33.29,103.4 33.78,103.4 37.97,107.59 | v43.05,121.16 43.05,120.02 41.66,118.62 40.51,118.62 37.97,116.08 37.97,107.59 | 37.97,107.59 37.97,107.57 39.5,106.05 43.56,106.05 v44.7,107.19
3.3V3  (via drill 0.51)
  Top 0.254: v96.9,121.16 R24.1 | v98.55,107.19 97.54,107.19 97.22,106.87 U15.5 97.25,105.92 97.25,105.28 | U14.2 87.14,103.4 v87.12,103.38 87.1,103.4 U14.23 81.7,103.4 C34.1 | R19.2 80.25,107.31 v79.12,107.31 78.99,107.19 69.6,107.19 68.96,107.82 U16.1 68.81,110.38 C44.1 | 97.25,105.28 97.25,104.23 97.54,103.94 C43.A | C35.1 97.26,105.3 97.25,105.28
  Bottom 0.254: v79.12,107.31 79.25,107.19 83.31,107.19 v87.12,103.38 87.14,103.4 87.63,103.4 91.82,107.59 | v96.9,121.16 96.9,120.02 95.5,118.62 94.36,118.62 91.82,116.08 91.82,107.59 | 91.82,107.59 91.82,107.57 93.34,106.05 97.41,106.05 v98.55,107.19
3.3V4  (via drill 0.51)
  Top 0.254: v43.05,185.93 R30.1 | v44.7,171.96 43.69,171.96 43.37,171.64 U19.5 43.4,170.69 43.4,170.05 | U18.2 33.29,168.17 v33.27,168.15 33.25,168.17 U18.23 27.85,168.17 C45.1 | R25.2 26.4,172.09 v25.27,172.09 25.15,171.96 15.75,171.96 15.11,172.59 U20.1 14.96,175.15 C55.1 | 43.4,170.05 43.4,169 43.69,168.71 C54.A | C46.1 43.41,170.07 43.4,170.05
  Bottom 0.254: v25.27,172.09 25.4,171.96 29.46,171.96 v33.27,168.15 33.29,168.17 33.78,168.17 37.97,172.36 | v43.05,185.93 43.05,184.78 41.66,183.39 40.51,183.39 37.97,180.85 37.97,172.36 | 37.97,172.36 37.97,172.34 39.5,170.81 43.56,170.81 v44.7,171.96
3.3V5  (via drill 0.51)
  Top 0.254: v96.9,185.93 R36.1 | v98.55,171.96 97.54,171.96 97.22,171.64 U23.5 97.25,170.69 97.25,170.05 | U22.2 87.14,168.17 v87.12,168.15 87.1,168.17 U22.23 81.7,168.17 C56.1 | R31.2 80.25,172.09 v79.12,172.09 78.99,171.96 69.6,171.96 68.96,172.59 U24.1 68.81,175.15 C66.1 | 97.25,170.05 97.25,169 97.54,168.71 C65.A | C57.1 97.26,170.07 97.25,170.05
  Bottom 0.254: v79.12,172.09 79.25,171.96 83.31,171.96 v87.12,168.15 87.14,168.17 87.63,168.17 91.82,172.36 | v96.9,185.93 96.9,184.78 95.5,183.39 94.36,183.39 91.82,180.85 91.82,172.36 | 91.82,172.36 91.82,172.34 93.34,170.81 97.41,170.81 v98.55,171.96
3.3V6  (via drill 0.51)
  Top 0.254: v43.05,250.7 R42.1 | v44.7,236.73 43.69,236.73 43.37,236.41 U27.5 43.4,235.46 43.4,234.82 | U26.2 33.29,232.94 v33.27,232.92 33.25,232.94 U26.23 27.85,232.94 C67.1 | R37.2 26.4,236.85 v25.27,236.85 25.15,236.73 15.75,236.73 15.11,237.36 U28.1 14.96,239.92 C77.1 | 43.4,234.82 43.4,233.77 43.69,233.48 C76.A | C68.1 43.41,234.84 43.4,234.82
  Bottom 0.254: v25.27,236.85 25.4,236.73 29.46,236.73 v33.27,232.92 33.29,232.94 33.78,232.94 37.97,237.13 | v43.05,250.7 43.05,249.56 41.66,248.16 40.51,248.16 37.97,245.62 37.97,237.13 | 37.97,237.13 37.97,237.11 39.5,235.59 43.56,235.59 v44.7,236.73
3.3V7  (via drill 0.51)
  Top 0.254: v96.9,250.7 R48.1 | v98.55,236.73 97.54,236.73 97.22,236.41 U31.5 97.25,235.46 97.25,234.82 | U30.2 87.14,232.94 v87.12,232.92 87.1,232.94 U30.23 81.7,232.94 C78.1 | R43.2 80.25,236.85 v79.12,236.85 78.99,236.73 69.6,236.73 68.96,237.36 U32.1 68.81,239.92 C88.1 | 97.25,234.82 97.25,233.77 97.54,233.48 C87.A | C79.1 97.26,234.84 97.25,234.82
  Bottom 0.254: v79.12,236.85 79.25,236.73 83.31,236.73 v87.12,232.92 87.14,232.94 87.63,232.94 91.82,237.13 | v96.9,250.7 96.9,249.56 95.5,248.16 94.36,248.16 91.82,245.62 91.82,237.13 | 91.82,237.13 91.82,237.11 93.34,235.59 97.41,235.59 v98.55,236.73
5V  (via drill 0.51)
  Top 0.254: U3.1 43.4,43.69 | C4.A
  Top 0.305: 43.4,43.69 47.5,43.69 48.77,44.96 IC1.2 48.77,48.01 47.5,49.28 47.5,50.04 | U3.1 43.37,42.99 43.05,42.67 41.78,42.67 41.47,42.99 U3.3 | v42.42,52.58 C4.A 42.42,49.15 42.04,48.77 F1.2 | 47.5,50.04 v47.5,51.31 | 47.5,50.04 R8.1 | 47.5,50.04 C9.1
  Bottom 0.305: v47.5,51.31 46.23,52.58 v42.42,52.58
5V1  (via drill 0.51)
  Top 0.254: U7.1 97.25,43.69 | C14.A
  Top 0.305: 97.25,43.69 101.35,43.69 102.62,44.96 IC2.2 102.62,48.01 101.35,49.28 101.35,50.04 | U7.1 97.22,42.99 96.9,42.67 95.63,42.67 95.32,42.99 U7.3 | v96.27,52.58 C14.A 96.27,49.15 95.89,48.77 F2.2 | 101.35,50.04 v101.35,51.31 | 101.35,50.04 R6.1 | 101.35,50.04 C19.1
  Bottom 0.305: v101.35,51.31 100.08,52.58 v96.27,52.58
5V2  (via drill 0.51)
  Top 0.254: U11.1 43.4,108.46 | C25.A
  Top 0.305: 43.4,108.46 47.5,108.46 48.77,109.73 IC3.2 48.77,112.78 47.5,114.05 47.5,114.81 | U11.1 43.37,107.76 43.05,107.44 41.78,107.44 41.47,107.76 U11.3 | v42.42,117.35 C25.A 42.42,113.92 42.04,113.54 F3.2 | 47.5,114.81 v47.5,116.08 | 47.5,114.81 R16.1 | 47.5,114.81 C30.1
  Bottom 0.305: v47.5,116.08 46.23,117.35 v42.42,117.35
5V3  (via drill 0.51)
  Top 0.254: U15.1 97.25,108.46 | C36.A
  Top 0.305: 97.25,108.46 101.35,108.46 102.62,109.73 IC4.2 102.62,112.78 101.35,114.05 101.35,114.81 | U15.1 97.22,107.76 96.9,107.44 95.63,107.44 95.32,107.76 U15.3 | v96.27,117.35 C36.A 96.27,113.92 95.89,113.54 F4.2 | 101.35,114.81 v101.35,116.08 | 101.35,114.81 R22.1 | 101.35,114.81 C41.1
  Bottom 0.305: v101.35,116.08 100.08,117.35 v96.27,117.35
5V4  (via drill 0.51)
  Top 0.254: U19.1 43.4,173.23 | C47.A
  Top 0.305: 43.4,173.23 47.5,173.23 48.77,174.5 IC5.2 48.77,177.55 47.5,178.82 47.5,179.58 | U19.1 43.37,172.53 43.05,172.21 41.78,172.21 41.47,172.53 U19.3 | v42.42,182.12 C47.A 42.42,178.69 42.04,178.31 F5.2 | 47.5,179.58 v47.5,180.85 | 47.5,179.58 R28.1 | 47.5,179.58 C52.1
  Bottom 0.305: v47.5,180.85 46.23,182.12 v42.42,182.12
5V5  (via drill 0.51)
  Top 0.254: U23.1 97.25,173.23 | C58.A
  Top 0.305: 97.25,173.23 101.35,173.23 102.62,174.5 IC6.2 102.62,177.55 101.35,178.82 101.35,179.58 | U23.1 97.22,172.53 96.9,172.21 95.63,172.21 95.32,172.53 U23.3 | v96.27,182.12 C58.A 96.27,178.69 95.89,178.31 F6.2 | 101.35,179.58 v101.35,180.85 | 101.35,179.58 R34.1 | 101.35,179.58 C63.1
  Bottom 0.305: v101.35,180.85 100.08,182.12 v96.27,182.12
5V6  (via drill 0.51)
  Top 0.254: U27.1 43.4,238 | C69.A
  Top 0.305: 43.4,238 47.5,238 48.77,239.27 IC7.2 48.77,242.32 47.5,243.59 47.5,244.35 | U27.1 43.37,237.3 43.05,236.98 41.78,236.98 41.47,237.3 U27.3 | v42.42,246.89 C69.A 42.42,243.46 42.04,243.08 F7.2 | 47.5,244.35 v47.5,245.62 | 47.5,244.35 R40.1 | 47.5,244.35 C74.1
  Bottom 0.305: v47.5,245.62 46.23,246.89 v42.42,246.89
5V7  (via drill 0.51)
  Top 0.254: U31.1 97.25,238 | C80.A
  Top 0.305: 97.25,238 101.35,238 102.62,239.27 IC8.2 102.62,242.32 101.35,243.59 101.35,244.35 | U31.1 97.22,237.3 96.9,236.98 95.63,236.98 95.32,237.3 U31.3 | v96.27,246.89 C80.A 96.27,243.46 95.89,243.08 F8.2 | 101.35,244.35 v101.35,245.62 | 101.35,244.35 R46.1 | 101.35,244.35 C85.1
  Bottom 0.305: v101.35,245.62 100.08,246.89 v96.27,246.89
GND  (via drill 0.51)
  Top 0.254: 30.98,40.63 30.99,40.64 31,40.63 | U2.19 31,40.63 | 31,40.63 31.48,40.63 32.23,41.38 v32.97,41.38 | U2.3 36.11,39.13 35.94,39.29
  other vias: 36.17,36.12 30.89,34.24 25.1,39.9 13.21,42.93 27.13,45.87
  pour Top (isolate 0.305): 6.86,6.86 6.86,66.55 60.2,66.55 60.2,6.86
  pour Bottom (isolate 0.305): 6.86,6.86 6.86,66.55 60.2,66.55 60.2,6.86
GND1  (via drill 0.51)
  Top 0.254: 84.82,40.63 84.84,40.64 84.85,40.63 | U6.19 84.85,40.63 | 84.85,40.63 85.33,40.63 86.08,41.38 v86.82,41.38 | U6.3 89.95,39.13 89.79,39.29
  other vias: 90.02,36.12 84.73,34.24 78.94,39.9 67.06,42.93 80.98,45.87
  pour Top (isolate 0.305): 60.71,6.86 60.71,66.55 114.05,66.55 114.05,6.86
  pour Bottom (isolate 0.305): 60.71,6.86 60.71,66.55 114.05,66.55 114.05,6.86
GND2  (via drill 0.51)
  Top 0.254: 30.98,105.4 30.99,105.41 31,105.4 | U10.19 31,105.4 | 31,105.4 31.48,105.4 32.23,106.15 v32.97,106.15 | U10.3 36.11,103.9 35.94,104.06
  other vias: 36.17,100.89 30.89,99.01 25.1,104.67 13.21,107.7 27.13,110.64
  pour Top (isolate 0.305): 6.86,71.63 6.86,131.32 60.2,131.32 60.2,71.63
  pour Bottom (isolate 0.305): 6.86,71.63 6.86,131.32 60.2,131.32 60.2,71.63
GND3  (via drill 0.51)
  Top 0.254: 84.82,105.4 84.84,105.41 84.85,105.4 | U14.19 84.85,105.4 | 84.85,105.4 85.33,105.4 86.08,106.15 v86.82,106.15 | U14.3 89.95,103.9 89.79,104.06
  other vias: 90.02,100.89 84.73,99.01 78.94,104.67 67.06,107.7 80.98,110.64
  pour Top (isolate 0.305): 60.71,71.63 60.71,131.32 114.05,131.32 114.05,71.63
  pour Bottom (isolate 0.305): 60.71,71.63 60.71,131.32 114.05,131.32 114.05,71.63
GND4  (via drill 0.51)
  Top 0.254: 30.98,170.17 30.99,170.18 31,170.17 | U18.19 31,170.17 | 31,170.17 31.48,170.17 32.23,170.92 v32.97,170.92 | U18.3 36.11,168.67 35.94,168.83
  other vias: 36.17,165.66 30.89,163.78 25.1,169.44 13.21,172.47 27.13,175.41
  pour Top (isolate 0.305): 6.86,136.4 6.86,196.09 60.2,196.09 60.2,136.4
  pour Bottom (isolate 0.305): 6.86,136.4 6.86,196.09 60.2,196.09 60.2,136.4
GND5  (via drill 0.51)
  Top 0.254: 84.82,170.17 84.84,170.18 84.85,170.17 | U22.19 84.85,170.17 | 84.85,170.17 85.33,170.17 86.08,170.92 v86.82,170.92 | U22.3 89.95,168.67 89.79,168.83
  other vias: 90.02,165.66 84.73,163.78 78.94,169.44 67.06,172.47 80.98,175.41
  pour Top (isolate 0.305): 60.71,136.4 60.71,196.09 114.05,196.09 114.05,136.4
  pour Bottom (isolate 0.305): 60.71,136.4 60.71,196.09 114.05,196.09 114.05,136.4
GND6  (via drill 0.51)
  Top 0.254: 30.98,234.94 30.99,234.95 31,234.94 | U26.19 31,234.94 | 31,234.94 31.48,234.94 32.23,235.69 v32.97,235.69 | U26.3 36.11,233.44 35.94,233.6
  other vias: 36.17,230.43 30.89,228.55 25.1,234.21 13.21,237.24 27.13,240.18
  pour Top (isolate 0.305): 6.86,201.17 6.86,260.86 60.2,260.86 60.2,201.17
  pour Bottom (isolate 0.305): 6.86,201.17 6.86,260.86 60.2,260.86 60.2,201.17
GND7  (via drill 0.51)
  Top 0.254: 84.82,234.94 84.84,234.95 84.85,234.94 | U30.19 84.85,234.94 | 84.85,234.94 85.33,234.94 86.08,235.69 v86.82,235.69 | U30.3 89.95,233.44 89.79,233.6
  other vias: 90.02,230.43 84.73,228.55 78.94,234.21 67.06,237.24 80.98,240.18
  pour Top (isolate 0.305): 60.71,201.17 60.71,260.86 114.05,260.86 114.05,201.17
  pour Bottom (isolate 0.305): 60.71,201.17 60.71,260.86 114.05,260.86 114.05,201.17
GPX
  Top 0.254: U2.17 9.88,41.63 9.4,41.15 U1.D8
GPX1
  Top 0.254: U6.17 63.73,41.63 63.25,41.15 U5.D8
GPX2
  Top 0.254: U10.17 9.88,106.4 9.4,105.92 U9.D8
GPX3
  Top 0.254: U14.17 63.73,106.4 63.25,105.92 U13.D8
GPX4
  Top 0.254: U18.17 9.88,171.17 9.4,170.69 U17.D8
GPX5
  Top 0.254: U22.17 63.73,171.17 63.25,170.69 U21.D8
GPX6
  Top 0.254: U26.17 9.88,235.94 9.4,235.46 U25.D8
GPX7
  Top 0.254: U30.17 63.73,235.94 63.25,235.46 U29.D8
INT  (via drill 0.51)
  Top 0.203: 30.01,41.15 U2.18 30.97,41.13 31.11,41.27 31.11,41.78 30.48,42.42 29.01,42.42 | 29.01,42.42 R7.1 | v29.06,43.64 29.06,42.47 29.01,42.42
  Top 0.254: U1.D9 24.13,37.34 v25.15,38.35
  Bottom 0.254: v29.06,43.64 29.01,43.69 25.04,43.69 23.98,42.62 23.98,39.52 v25.15,38.35
INT1  (via drill 0.51)
  Top 0.203: 83.86,41.15 U6.18 84.82,41.13 84.96,41.27 84.96,41.78 84.33,42.42 82.86,42.42 | 82.86,42.42 R3.1 | v82.91,43.64 82.91,42.47 82.86,42.42
  Top 0.254: U5.D9 77.98,37.34 v78.99,38.35
  Bottom 0.254: v82.91,43.64 82.86,43.69 78.89,43.69 77.83,42.62 77.83,39.52 v78.99,38.35
INT2  (via drill 0.51)
  Top 0.203: 30.01,105.92 U10.18 30.97,105.9 31.11,106.05 31.11,106.55 30.48,107.19 29.01,107.19 | 29.01,107.19 R12.1 | v29.06,108.41 29.06,107.24 29.01,107.19
  Top 0.254: U9.D9 24.13,102.11 v25.15,103.12
  Bottom 0.254: v29.06,108.41 29.01,108.46 25.04,108.46 23.98,107.39 23.98,104.29 v25.15,103.12
INT3  (via drill 0.51)
  Top 0.203: 83.86,105.92 U14.18 84.82,105.9 84.96,106.05 84.96,106.55 84.33,107.19 82.86,107.19 | 82.86,107.19 R19.1 | v82.91,108.41 82.91,107.24 82.86,107.19
  Top 0.254: U13.D9 77.98,102.11 v78.99,103.12
  Bottom 0.254: v82.91,108.41 82.86,108.46 78.89,108.46 77.83,107.39 77.83,104.29 v78.99,103.12
INT4  (via drill 0.51)
  Top 0.203: 30.01,170.69 U18.18 30.97,170.67 31.11,170.81 31.11,171.32 30.48,171.96 29.01,171.96 | 29.01,171.96 R25.1 | v29.06,173.18 29.06,172.01 29.01,171.96
  Top 0.254: U17.D9 24.13,166.88 v25.15,167.89
  Bottom 0.254: v29.06,173.18 29.01,173.23 25.04,173.23 23.98,172.16 23.98,169.06 v25.15,167.89
INT5  (via drill 0.51)
  Top 0.203: 83.86,170.69 U22.18 84.82,170.67 84.96,170.81 84.96,171.32 84.33,171.96 82.86,171.96 | 82.86,171.96 R31.1 | v82.91,173.18 82.91,172.01 82.86,171.96
  Top 0.254: U21.D9 77.98,166.88 v78.99,167.89
  Bottom 0.254: v82.91,173.18 82.86,173.23 78.89,173.23 77.83,172.16 77.83,169.06 v78.99,167.89
INT6  (via drill 0.51)
  Top 0.203: 30.01,235.46 U26.18 30.97,235.44 31.11,235.59 31.11,236.09 30.48,236.73 29.01,236.73 | 29.01,236.73 R37.1 | v29.06,237.95 29.06,236.78 29.01,236.73
  Top 0.254: U25.D9 24.13,231.65 v25.15,232.66
  Bottom 0.254: v29.06,237.95 29.01,238 25.04,238 23.98,236.93 23.98,233.83 v25.15,232.66
INT7  (via drill 0.51)
  Top 0.203: 83.86,235.46 U30.18 84.82,235.44 84.96,235.59 84.96,236.09 84.33,236.73 82.86,236.73 | 82.86,236.73 R43.1 | v82.91,237.95 82.91,236.78 82.86,236.73
  Top 0.254: U29.D9 77.98,231.65 v78.99,232.66
  Bottom 0.254: v82.91,237.95 82.86,238 78.89,238 77.83,236.93 77.83,233.83 v78.99,232.66
MISO  (via drill 0.51)
  Top 0.254: v30.68,43.2 30.68,42.88 31.37,42.19 31.98,42.19 32.28,42.49 U2.15
  Bottom 0.254: U1.D12 14.73,29.72 23.09,38.08 23.09,42.62 25.43,44.96 29.79,44.96 30.68,44.07 v30.68,43.2
MISO1  (via drill 0.51)
  Top 0.254: v84.53,43.2 84.53,42.88 85.22,42.19 85.83,42.19 86.13,42.49 U6.15
  Bottom 0.254: U5.D12 68.58,29.72 76.94,38.08 76.94,42.62 79.27,44.96 83.64,44.96 84.53,44.07 v84.53,43.2
MISO2  (via drill 0.51)
  Top 0.254: v30.68,107.97 30.68,107.64 31.37,106.96 31.98,106.96 32.28,107.26 U10.15
  Bottom 0.254: U9.D12 14.73,94.49 23.09,102.84 23.09,107.39 25.43,109.73 29.79,109.73 30.68,108.84 v30.68,107.97
MISO3  (via drill 0.51)
  Top 0.254: v84.53,107.97 84.53,107.64 85.22,106.96 85.83,106.96 86.13,107.26 U14.15
  Bottom 0.254: U13.D12 68.58,94.49 76.94,102.84 76.94,107.39 79.27,109.73 83.64,109.73 84.53,108.84 v84.53,107.97
MISO4  (via drill 0.51)
  Top 0.254: v30.68,172.75 30.68,172.41 31.37,171.73 31.98,171.73 32.28,172.03 U18.15
  Bottom 0.254: U17.D12 14.73,159.26 23.09,167.62 23.09,172.16 25.43,174.5 29.79,174.5 30.68,173.61 v30.68,172.75
MISO5  (via drill 0.51)
  Top 0.254: v84.53,172.75 84.53,172.41 85.22,171.73 85.83,171.73 86.13,172.03 U22.15
  Bottom 0.254: U21.D12 68.58,159.26 76.94,167.62 76.94,172.16 79.27,174.5 83.64,174.5 84.53,173.61 v84.53,172.75
MISO6  (via drill 0.51)
  Top 0.254: v30.68,237.51 30.68,237.19 31.37,236.5 31.98,236.5 32.28,236.8 U26.15
  Bottom 0.254: U25.D12 14.73,224.03 23.09,232.38 23.09,236.93 25.43,239.27 29.79,239.27 30.68,238.38 v30.68,237.51
MISO7  (via drill 0.51)
  Top 0.254: v84.53,237.51 84.53,237.19 85.22,236.5 85.83,236.5 86.13,236.8 U30.15
  Bottom 0.254: U29.D12 68.58,224.03 76.94,232.38 76.94,236.93 79.27,239.27 83.64,239.27 84.53,238.38 v84.53,237.51
MOSI  (via drill 0.51)
  Top 0.254: U4.7 22.73,44.45 v21.84,43.56
  Bottom 0.254: v21.84,43.56 21.84,43.43 21.21,42.8 21.21,41.78 11.68,32.26 U1.D11
MOSI1  (via drill 0.51)
  Top 0.254: U8.7 76.58,44.45 v75.69,43.56
  Bottom 0.254: v75.69,43.56 75.69,43.43 75.06,42.8 75.06,41.78 65.53,32.26 U5.D11
MOSI2  (via drill 0.51)
  Top 0.254: U12.7 22.73,109.22 v21.84,108.33
  Bottom 0.254: v21.84,108.33 21.84,108.2 21.21,107.57 21.21,106.55 11.68,97.03 U9.D11
MOSI3  (via drill 0.51)
  Top 0.254: U16.7 76.58,109.22 v75.69,108.33
  Bottom 0.254: v75.69,108.33 75.69,108.2 75.06,107.57 75.06,106.55 65.53,97.03 U13.D11
MOSI4  (via drill 0.51)
  Top 0.254: U20.7 22.73,173.99 v21.84,173.1
  Bottom 0.254: v21.84,173.1 21.84,172.97 21.21,172.34 21.21,171.32 11.68,161.8 U17.D11
MOSI5  (via drill 0.51)
  Top 0.254: U24.7 76.58,173.99 v75.69,173.1
  Bottom 0.254: v75.69,173.1 75.69,172.97 75.06,172.34 75.06,171.32 65.53,161.8 U21.D11
MOSI6  (via drill 0.51)
  Top 0.254: U28.7 22.73,238.76 v21.84,237.87
  Bottom 0.254: v21.84,237.87 21.84,237.74 21.21,237.11 21.21,236.09 11.68,226.57 U25.D11
MOSI7  (via drill 0.51)
  Top 0.254: U32.7 76.58,238.76 v75.69,237.87
  Bottom 0.254: v75.69,237.87 75.69,237.74 75.06,237.11 75.06,236.09 65.53,226.57 U29.D11
MOSI-IN
  Top 0.254: U4.6 21.46,47.24 22.35,48.13 26.54,48.13 29.08,45.59 30.86,45.59 31.78,44.68 U2.16
MOSI-IN1
  Top 0.254: U8.6 75.31,47.24 76.2,48.13 80.39,48.13 82.93,45.59 84.71,45.59 85.63,44.68 U6.16
MOSI-IN2
  Top 0.254: U12.6 21.46,112.01 22.35,112.9 26.54,112.9 29.08,110.36 30.86,110.36 31.78,109.45 U10.16
MOSI-IN3
  Top 0.254: U16.6 75.31,112.01 76.2,112.9 80.39,112.9 82.93,110.36 84.71,110.36 85.63,109.45 U14.16
MOSI-IN4
  Top 0.254: U20.6 21.46,176.78 22.35,177.67 26.54,177.67 29.08,175.13 30.86,175.13 31.78,174.22 U18.16
MOSI-IN5
  Top 0.254: U24.6 75.31,176.78 76.2,177.67 80.39,177.67 82.93,175.13 84.71,175.13 85.63,174.22 U22.16
MOSI-IN6
  Top 0.254: U28.6 21.46,241.55 22.35,242.44 26.54,242.44 29.08,239.9 30.86,239.9 31.78,238.99 U26.16
MOSI-IN7
  Top 0.254: U32.6 75.31,241.55 76.2,242.44 80.39,242.44 82.93,239.9 84.71,239.9 85.63,238.99 U30.16
N$1
  Top 0.254: U2.1 37.03,30.68 JP2.8
N$2  (via drill 0.51)
  Top 0.254: U2.20 33.14,40.13 v33.53,39.88 | R2.1 35.45,54.5 v36.07,55.12
  Bottom 0.254: v33.53,39.88 36.58,42.93 36.58,54.61 v36.07,55.12
N$3  (via drill 0.51)
  Top 0.254: v22.1,39.88 23.37,41.15 28.45,41.15 29.08,40.51 29.08,39.88 29.33,39.63 U2.21 | R1.1 30.48,48.64 v29.97,49.15
  Bottom 0.254: v22.1,39.88 22.1,42.42 28.83,49.15 v29.97,49.15
N$4
  Top 0.254: U2.4 37.92,39.63 38.91,38.63 38.91,30.02 JP3.1
N$5
  Top 0.254: R1.2 32.91,50.78 32.53,51.16 X2.D+
N$6
  Top 0.254: U2.5 38.36,40.13 39.88,38.61 39.88,28.45 JP3.2
N$7
  Top 0.254: U2.6 38.87,40.63 40.89,38.61 40.89,27.43 JP3.3
N$8
  Top 0.254: R2.2 34.15,50.66 34.53,51.04 X2.D-
N$9
  Top 0.254: U2.25 31.44,36.72 C5.1 30.37,36.72 29.72,36.07 29.15,36.07 Q2.1
N$10
  Top 0.203: U2.24 28.59,38.13 C6.1
  Top 0.254: Q2.3 26.03,33.65 27.18,34.8 27.18,36.72 C6.1 27.89,37.34
N$11
  Top 0.254: R8.2 R9.1 50.66,48.78 51.08,48.36 IC1.1
N$12
  Top 0.254: S2.3 56.77,31.88 U1.RES
N$13
  Top 0.254: U2.7 39.26,41.13 41.91,38.48 41.91,28.83 JP3.4
N$14  (via drill 0.51)
  Top 0.254: U2.8 39.52,41.63 41.15,40.01 v42.42,40.01
  Bottom 0.254: v42.42,40.01 42.42,30.99 JP3.5
N$15  (via drill 0.51)
  Top 0.254: U2.9 38.92,43.38 v39.88,42.42
  Bottom 0.254: v39.88,42.42 41.15,43.69 46.23,43.69 48.77,41.15 JP3.6
N$16  (via drill 0.51)
  Top 0.254: U2.10 34.78,44.23 35,44.45 39.12,44.45 v39.88,43.69
  Bottom 0.254: v39.88,43.69 39.88,43.71 40.69,44.53 50.47,44.53 51.31,43.69 JP3.7
N$17  (via drill 0.51)
  Top 0.254: U2.11 34.28,44.82 34.67,45.21 39.62,45.21 v39.88,44.96
  Bottom 0.254: JP3.8 53.85,43.69 51.31,46.23 41.15,46.23 v39.88,44.96
N$18
  Top 0.254: U2.32 35.28,31.47 JP2.7
N$19
  Top 0.254: U2.31 34.78,32.26 31.5,28.85 28.98,28.85 28.45,28.45 JP2.6
N$20
  Top 0.254: U2.30 34.28,32.86 31.39,29.97 26.52,29.97 25.91,29.36 JP2.5
N$21
  Top 0.254: U2.29 33.78,33.19 31.22,30.63 24.31,30.63 23.37,29.69 JP2.4
N$22
  Top 0.254: U2.28 33.28,33.56 31.17,31.45 21.31,31.45 20.83,30.96 JP2.3
N$23
  Top 0.254: U2.27 32.78,33.92 30.99,32.13 19.43,32.13 18.29,30.99 JP2.2
N$24
  Top 0.254: JP2.1 15.75,29.72 18.72,32.69 30.68,32.69 32.28,34.28 U2.26
N$25
  Top 0.254: LED1.A R14.2
N$26  (via drill 1.02 pad 1.88)
  other vias: 15.75,24.64
N$27  (via drill 1.02 pad 1.88)
  other vias: 15.75,22.1
N$28  (via drill 1.02 pad 1.88)
  other vias: 15.75,19.56
N$29  (via drill 1.02 pad 1.88)
  other vias: 15.75,17.02
N$30  (via drill 1.02 pad 1.88)
  other vias: 15.75,14.48
N$31  (via drill 1.02 pad 1.88)
  other vias: 15.75,11.94
N$32  (via drill 1.02 pad 1.88)
  other vias: 15.75,9.4
N$33  (via drill 1.02 pad 1.88)
  other vias: 18.29,24.64
N$34  (via drill 1.02 pad 1.88)
  other vias: 18.29,22.1
N$35  (via drill 1.02 pad 1.88)
  other vias: 18.29,19.56
N$36  (via drill 1.02 pad 1.88)
  other vias: 18.29,17.02
N$37  (via drill 1.02 pad 1.88)
  other vias: 18.29,14.48
N$38  (via drill 1.02 pad 1.88)
  other vias: 18.29,11.94
N$39  (via drill 1.02 pad 1.88)
  other vias: 18.29,9.4
N$40  (via drill 1.02 pad 1.88)
  other vias: 20.83,9.4
N$41  (via drill 1.02 pad 1.88)
  other vias: 23.37,9.4
N$42  (via drill 1.02 pad 1.88)
  other vias: 25.91,9.4
N$43  (via drill 1.02 pad 1.88)
  other vias: 28.45,9.4
N$44  (via drill 1.02 pad 1.88)
  other vias: 30.99,9.4
N$45  (via drill 1.02 pad 1.88)
  other vias: 33.53,9.4
N$46  (via drill 1.02 pad 1.88)
  other vias: 36.07,9.4
N$47  (via drill 1.02 pad 1.88)
  other vias: 38.61,9.4
N$48  (via drill 1.02 pad 1.88)
  other vias: 41.15,9.4
N$49  (via drill 1.02 pad 1.88)
  other vias: 43.69,9.4
N$50  (via drill 1.02 pad 1.88)
  other vias: 46.23,9.4
N$51  (via drill 1.02 pad 1.88)
  other vias: 48.77,9.4
N$52  (via drill 1.02 pad 1.88)
  other vias: 51.31,9.4
N$53  (via drill 1.02 pad 1.88)
  other vias: 53.85,9.4
N$54  (via drill 1.02 pad 1.88)
  other vias: 53.85,24.64
N$55  (via drill 1.02 pad 1.88)
  other vias: 53.85,22.1
N$56  (via drill 1.02 pad 1.88)
  other vias: 53.85,19.56
N$57  (via drill 1.02 pad 1.88)
  other vias: 53.85,17.02
N$58  (via drill 1.02 pad 1.88)
  other vias: 53.85,14.48
N$59  (via drill 1.02 pad 1.88)
  other vias: 53.85,11.94
N$60  (via drill 1.02 pad 1.88)
  other vias: 20.83,24.64
N$61  (via drill 1.02 pad 1.88)
  other vias: 20.83,22.1
N$62  (via drill 1.02 pad 1.88)
  other vias: 20.83,19.56
N$63  (via drill 1.02 pad 1.88)
  other vias: 20.83,17.02
N$64  (via drill 1.02 pad 1.88)
  other vias: 20.83,14.48
N$65  (via drill 1.02 pad 1.88)
  other vias: 20.83,11.94
N$66  (via drill 1.02 pad 1.88)
  other vias: 23.37,11.94
N$67  (via drill 1.02 pad 1.88)
  other vias: 23.37,14.48
N$68  (via drill 1.02 pad 1.88)
  other vias: 23.37,17.02
N$69  (via drill 1.02 pad 1.88)
  other vias: 23.37,19.56
N$70  (via drill 1.02 pad 1.88)
  other vias: 23.37,22.1
N$71  (via drill 1.02 pad 1.88)
  other vias: 23.37,24.64
N$72  (via drill 1.02 pad 1.88)
  other vias: 25.91,24.64
N$73  (via drill 1.02 pad 1.88)
  other vias: 25.91,22.1
N$74  (via drill 1.02 pad 1.88)
  other vias: 25.91,19.56
N$75  (via drill 1.02 pad 1.88)
  other vias: 25.91,17.02
N$76  (via drill 1.02 pad 1.88)
  other vias: 25.91,14.48
N$77  (via drill 1.02 pad 1.88)
  other vias: 25.91,11.94
N$78  (via drill 1.02 pad 1.88)
  other vias: 28.45,11.94
N$79  (via drill 1.02 pad 1.88)
  other vias: 28.45,14.48
N$80  (via drill 1.02 pad 1.88)
  other vias: 28.45,17.02
N$81  (via drill 1.02 pad 1.88)
  other vias: 28.45,19.56
N$82  (via drill 1.02 pad 1.88)
  other vias: 28.45,22.1
N$83  (via drill 1.02 pad 1.88)
  other vias: 28.45,24.64
N$84  (via drill 1.02 pad 1.88)
  other vias: 30.99,24.64
N$85  (via drill 1.02 pad 1.88)
  other vias: 30.99,22.1
N$86  (via drill 1.02 pad 1.88)
  other vias: 30.99,19.56
N$87  (via drill 1.02 pad 1.88)
  other vias: 30.99,17.02
N$88  (via drill 1.02 pad 1.88)
  other vias: 30.99,14.48
N$89  (via drill 1.02 pad 1.88)
  other vias: 30.99,11.94
N$90  (via drill 1.02 pad 1.88)
  other vias: 33.53,11.94
N$91  (via drill 1.02 pad 1.88)
  other vias: 36.07,11.94
N$92  (via drill 1.02 pad 1.88)
  other vias: 38.61,11.94